# EAGLE board power_v1 (EAGLE 8.2.1)

Size 127 x 76.2 mm. Coordinates in mm from the lower left corner, seen from the top.
Outline: 0,0 127,0 127,76.2 0,76.2 0,0
Copper layers (1*16): Top 0.035mm / dielectric 1.5mm / Bottom 0.035mm
Design rules "default": minimum track width 6mil, minimum drill 0.35mm, track to track 6mil, track to pad 6mil, pad to pad 6mil, via to via 6mil, smd to smd 6mil, copper to edge 40mil, drill to drill 6mil, minimum pad ring 10mil, minimum via ring 8mil, stop-mask expansion 4mil, vias tented up to drill 0mil, thermal gap 10mil

## Footprints (pad centres in the part's own frame; a part is rotated, then mirrored left to right if it is on the bottom)
SOT457 = smd 0.5 x 0.8: P$1 -0.95,-1.15; P$2 0,-1.15; P$3 0.95,-1.15; P$4 0.95,1.15; P$5 0,1.15; P$6 -0.95,1.15
DO-219AB = smd 1.3 x 1.4: P$1 -1.45,0; P$2 1.45,0
KK254_VERT_2PIN = drill 1.2 octagon: P$1 1.27,0; P$2 -1.27,0
SOD106-R = smd 1.6 x 2.1: A 2.25,0; C -2.25,0
154-OMNI-BLOK = smd 3.81 x 4.242: P$1 -3.188,0; P$2 3.188,0
QSOP28 = smd 1.6 x 0.356: 1 -2.654,4.128; 2 -2.654,3.493; 3 -2.654,2.857; 4 -2.654,2.223; 5 -2.654,1.587; 6 -2.654,0.953; 7 -2.654,0.318; 8 -2.654,-0.318; 9 -2.654,-0.953; 10 -2.654,-1.587; 11 -2.654,-2.223; 12 -2.654,-2.857; 13 -2.654,-3.493; 14 -2.654,-4.128; 15 2.654,-4.128; 16 2.654,-3.493; 17 2.654,-2.857; 18 2.654,-2.223; 19 2.654,-1.587; 20 2.654,-0.953; 21 2.654,-0.318; 22 2.654,0.318; 23 2.654,0.953; 24 2.654,1.587; 25 2.654,2.223; 26 2.654,2.857; 27 2.654,3.493; 28 2.654,4.128
SUPERSABRE_2CIRCUIT = drill 5.25: P$1 -3.747,0; P$2 3.747,0 | hole 2.997: -8.534,-1.803; 8.534,-1.803
C0805 = smd 1.3 x 1.5: 1 -0.85,0; 2 0.85,0
E3,5-8 = drill 0.813 pad 1.6: + -1.778,0 | drill 0.813 pad 1.6 octagon: - 1.778,0
SOD123 = smd 1.4 x 1.4: A 1.9,0; C -1.9,0
MPSC-01-80 = drill 1.05 square: 1 19,0.33 | drill 1.05 octagon: 2 17,0.33; 3 15,0.33; 4 13,0.33; 5 11,0.33; 6 9,0.33; 7 7,0.33; 8 5,0.33; 9 3,0.33; 10 1,0.33; 11 -1,0.33; 12 -3,0.33; 13 -5,0.33; 14 -7,0.33; 15 -9,0.33; 16 -11,0.33; 17 -13,0.33; 18 -15,0.33; 19 -17,0.33; 20 -19,0.33; 21 19,2.33; 22 17,2.33; 23 15,2.33; 24 13,2.33; 25 11,2.33; 26 9,2.33; 27 7,2.33; 28 5,2.33; 29 3,2.33; 30 1,2.33; 31 -1,2.33; 32 -3,2.33; 33 -5,2.33; 34 -7,2.33; 35 -9,2.33; 36 -11,2.33; 37 -13,2.33; 38 -15,2.33; 39 -17,2.33; 40 -19,2.33; 41 19,4.33; 42 17,4.33; 43 15,4.33; 44 13,4.33; 45 11,4.33; 46 9,4.33; 47 7,4.33; 48 5,4.33; 49 3,4.33; 50 1,4.33; 51 -1,4.33; 52 -3,4.33; 53 -5,4.33; 54 -7,4.33; 55 -9,4.33; 56 -11,4.33; 57 -13,4.33; 58 -15,4.33; 59 -17,4.33; 60 -19,4.33; 61 19,6.33; 62 17,6.33; 63 15,6.33; 64 13,6.33; 65 11,6.33; 66 9,6.33; 67 7,6.33; 68 5,6.33; 69 3,6.33; 70 1,6.33; 71 -1,6.33; 72 -3,6.33; 73 -5,6.33; 74 -7,6.33; 75 -9,6.33; 76 -11,6.33; 77 -13,6.33; 78 -15,6.33; 79 -17,6.33; 80 -19,6.33 | drill 1.1 octagon: P1,1 22.505,0.79; P1,2 22.505,3.29; P1,3 22.505,5.87; P1,4 24.385,0.79; P1,5 24.385,3.29; P1,6 24.385,5.87; P2,1 -22.505,0.789; P2,2 -22.505,3.329; P2,3 -22.505,5.869; P2,4 -24.385,0.789; P2,5 -24.345,3.329; P2,6 -24.385,5.869 | hole 3.56: -29.085,3.916; 29.085,3.916
L6100 = drill 1 square: P$1 -3,0 | drill 1 octagon: P$2 3,0
CHIP-LED0805 = smd 1.2 x 1.2: A 0,-1.05; C 0,1.05
CHIPLED_0805 = smd 1.2 x 1.2: A 0,-1.05; C 0,1.05
0805 = smd 1.2 x 1.2: P$1 -1.05,0; P$2 1.05,0
DPAK = smd 3 x 1.6: 1 1.57,-2.3; 3 1.57,2.3 | smd 6.7 x 6.7: TAB -5.08,0
RTRIM3314J = smd 1.3 x 2: 1 -1.8,-2; 3 1.8,-2 | smd 2 x 2: 2 0,2
R0805 = smd 1.3 x 1.5: 1 -0.85,0; 2 0.85,0
R2512 = smd 1.8 x 3.2: 1 -2.8,0; 2 2.8,0
V526-0 = drill 0.813 octagon: 1 -1.27,0; 2 1.27,0
2-0.3MM-LEADS = drill 0.4: P$1 -1.27,0; P$2 1.27,0
SOT-346-3/S-MINI = smd 0.6 x 0.8: P$1 -0.95,-1; P$2 0.95,-1; P$3 0,1
TSSOP5 = smd 0.3 x 0.6: P$1 -0.65,-1.125; P$2 0,-1.125; P$3 0.65,-1.125; P$4 0.65,1.125; P$5 -0.62,1.125
SOT-223 = smd 1.5 x 2: P$1 -2.3,-3.15; P$2 0,-3.15; P$3 2.3,-3.15 | smd 3.8 x 2: P$4 0,2.54
MSOP16 = smd 0.305 x 0.889: DGATE -0.25,-2.39; ENOUT -0.75,2.39; FB -1.75,2.39; FLT -0.25,2.39; GND 0.25,2.39; HGATE 0.75,-2.39; NC -0.75,-2.39; NC1 1.25,-2.39; OUT -1.75,-2.39; OV 0.75,2.39; SENSE -1.25,-2.39; SHDN 1.75,2.39; SOURCE 0.25,-2.39; TMR -1.25,2.39; UV 1.25,2.39; VCC 1.75,-2.39
SOT23 = smd 1 x 1.4: 1 -0.95,-1.1; 2 0.95,-1.1; 3 0,1.1
SOT-23-3 = smd 1.3 x 0.6: P$1 -1.05,0.95; P$2 -1.05,-0.95; P$3 1.05,0

## Placement (x,y rotation side)
5-TVS_1  BZA408B  [SOT457]  -113.03,119.38 0 top  (outside the outline)
24V-TVS-1  VTVS  [DO-219AB]  -41.91,119.38 0 top  (outside the outline)
24V-TVS-2  VTVS  [DO-219AB]  -48.26,119.38 0 top  (outside the outline)
24V-TVS-3  VTVS  [DO-219AB]  -54.61,119.38 0 top  (outside the outline)
24V-TVS-4  VTVS  [DO-219AB]  -60.96,119.38 0 top  (outside the outline)
24V-TVS-5  VTVS  [DO-219AB]  -67.31,119.38 0 top  (outside the outline)
24V-TVS-6  VTVS  [DO-219AB]  -73.66,119.38 0 top  (outside the outline)
24V-TVS-7  VTVS  [DO-219AB]  -80.01,119.38 0 top  (outside the outline)
24V-TVS-8  VTVS  [DO-219AB]  -86.36,119.38 0 top  (outside the outline)
24V-TVS-9  VTVS  [DO-219AB]  -92.71,119.38 0 top  (outside the outline)
24V-TVS_1  VTVS  [DO-219AB]  -99.06,119.38 0 top  (outside the outline)
24V-TVS_2  VTVS  [DO-219AB]  -105.41,119.38 0 top  (outside the outline)
AUDIO  KK254_VERT_2PIN22-29-2021  [KK254_VERT_2PIN]  -109.22,36.83 0 top  (outside the outline)
AUDIO1  KK254_VERT_2PIN22-29-2021  [KK254_VERT_2PIN]  -35.56,50.8 0 top  (outside the outline)
B1-ZENER  [SOD106-R]  -33.02,123.19 0 top  (outside the outline)
B1-ZENER1  [SOD106-R]  -21.59,123.19 0 top  (outside the outline)
BATT1_FUSE  4A  [154-OMNI-BLOK]  -46.99,62.23 0 top  (outside the outline)
BATT1_IC  MAX1737  [QSOP28]  -76.2,-2.54 0 top  (outside the outline)
BATT1_IC1  MAX1737  [QSOP28]  -67.31,36.83 0 top  (outside the outline)
BATT1_IN  2_SUPERSABRE  [SUPERSABRE_2CIRCUIT]  13.97,39.37 90 top
BATT2_FUSE  4A  [154-OMNI-BLOK]  -60.96,62.23 0 top  (outside the outline)
BATT2_IN  2_SUPERSABRE  [SUPERSABRE_2CIRCUIT]  13.97,80.01 90 top
BUZZER  KK254_VERT_2PIN22-29-2021  [KK254_VERT_2PIN]  -63.5,50.8 0 top  (outside the outline)
BUZZER1  KK254_VERT_2PIN22-29-2021  [KK254_VERT_2PIN]  -91.44,50.8 0 top  (outside the outline)
C1  0.1u  [C0805]  -99.06,86.36 0 top  (outside the outline)
C2  2.2u  [C0805]  -104.14,86.36 0 top  (outside the outline)
C3  2.2u  [C0805]  -109.22,86.36 0 top  (outside the outline)
C4  1u  [C0805]  -76.2,113.03 0 top  (outside the outline)
C5  0.1u  [C0805]  -114.3,86.36 0 top  (outside the outline)
C6  1n  [C0805]  -80.01,113.03 0 top  (outside the outline)
C7  47n  [C0805]  -57.15,113.03 0 top  (outside the outline)
C8  47n  [C0805]  -62.23,113.03 0 top  (outside the outline)
C9  1n  [C0805]  -83.82,113.03 0 top  (outside the outline)
C10  1n  [C0805]  -72.39,106.68 0 top  (outside the outline)
C11  0.1  [C0805]  -77.47,106.68 0 top  (outside the outline)
C12  0.1u  [C0805]  -119.38,86.36 0 top  (outside the outline)
C13  0.1u  [C0805]  -16.51,93.98 0 top  (outside the outline)
C14  0.1u  [C0805]  -21.59,93.98 0 top  (outside the outline)
C15  0.1u  [C0805]  -26.67,93.98 0 top  (outside the outline)
C16  120u  [E3,5-8]  -93.98,60.96 0 top  (outside the outline)
C17  47n  [C0805]  -82.55,106.68 0 top  (outside the outline)
C18  22u  [C0805]  -87.63,106.68 0 top  (outside the outline)
C20  0.1  [C0805]  -92.71,106.68 0 top  (outside the outline)
C25  0.1  [C0805]  -97.79,106.68 0 top  (outside the outline)
C26  0.1  [C0805]  -102.87,106.68 0 top  (outside the outline)
C60  1u  [C0805]  -107.95,106.68 0 top  (outside the outline)
C61  10u  [C0805]  -113.03,106.68 0 top  (outside the outline)
C62  10u  [C0805]  -118.11,106.68 0 top  (outside the outline)
C63  0.1u  [C0805]  -31.75,93.98 0 top  (outside the outline)
C64  47n  [C0805]  -16.51,113.03 0 top  (outside the outline)
C65  22u  [C0805]  -21.59,113.03 0 top  (outside the outline)
C66  2.2u  [C0805]  -36.83,93.98 0 top  (outside the outline)
C67  2.2u  [C0805]  -41.91,93.98 0 top  (outside the outline)
C69  1u  [C0805]  -26.67,113.03 0 top  (outside the outline)
C70  0.1u  [C0805]  -46.99,93.98 0 top  (outside the outline)
C71  1n  [C0805]  -31.75,113.03 0 top  (outside the outline)
C72  47n  [C0805]  -36.83,113.03 0 top  (outside the outline)
C73  47n  [C0805]  -41.91,113.03 0 top  (outside the outline)
C74  1n  [C0805]  -46.99,113.03 0 top  (outside the outline)
C75  1n  [C0805]  -52.07,113.03 0 top  (outside the outline)
C78  0.1u  [C0805]  -52.07,93.98 0 top  (outside the outline)
C79  0.1u  [C0805]  -57.15,93.98 0 top  (outside the outline)
C82  0.1u  [C0805]  -62.23,93.98 0 top  (outside the outline)
C83  0.1u  [C0805]  -67.31,93.98 0 top  (outside the outline)
C84  120u  [E3,5-8]  -105.41,60.96 0 top  (outside the outline)
CHARGING-SWITCH  KK254_VERT_2PIN22-29-2021  [KK254_VERT_2PIN]  -35.56,62.23 0 top  (outside the outline)
D1  [SOD123]  -39.37,123.19 0 top  (outside the outline)
D2  [SOD123]  -45.72,123.19 0 top  (outside the outline)
JP1  [MPSC-01-80]  90.17,5.08 0 top
L1  10uH  [L6100]  -33.02,36.83 0 top  (outside the outline)
L2  10uH  [L6100]  -44.45,36.83 0 top  (outside the outline)
LED1  FASTCHG  [CHIP-LED0805]  -77.47,58.42 0 top  (outside the outline)
LED2  FULLCHG  [CHIP-LED0805]  -16.51,69.85 0 top  (outside the outline)
LED3  FAULT  [CHIP-LED0805]  -40.64,78.74 0 top  (outside the outline)
LED4  Batt Connect.  [CHIP-LED0805]  -53.34,33.02 0 top  (outside the outline)
LED5  FASTCHG  [CHIP-LED0805]  -83.82,58.42 0 top  (outside the outline)
LED6  FULLCHG  [CHIP-LED0805]  -22.86,69.85 0 top  (outside the outline)
LED7  Shore Power  [CHIP-LED0805]  -74.93,33.02 0 top  (outside the outline)
LED8  CHARGING  [CHIP-LED0805]  -71.12,58.42 0 top  (outside the outline)
LED9  FAULT  [CHIP-LED0805]  -46.99,78.74 0 top  (outside the outline)
LED10  Red  [CHIPLED_0805]  -109.22,78.74 0 top  (outside the outline)
LED11  Red  [CHIPLED_0805]  -115.57,78.74 0 top  (outside the outline)
LED12  [CHIPLED_0805]  -120.65,78.74 0 top  (outside the outline)
LED13  [CHIPLED_0805]  -13.97,86.36 0 top  (outside the outline)
LED14  Blue  [0805]  -60.96,124.46 0 top  (outside the outline)
LED15  Blue  [0805]  -64.77,124.46 0 top  (outside the outline)
LED16  Green  [0805]  -68.58,124.46 0 top  (outside the outline)
LED17  Green  [0805]  -72.39,124.46 0 top  (outside the outline)
LED18  Batt Connect.  [CHIP-LED0805]  -59.69,33.02 0 top  (outside the outline)
LED19  ORING  [CHIP-LED0805]  -34.29,78.74 0 top  (outside the outline)
NMOS1  STD95N2LH5  [DPAK]  -82.55,24.13 0 top  (outside the outline)
NMOS2  STD95N2LH5  [DPAK]  -96.52,24.13 0 top  (outside the outline)
NMOS5  STD95N2LH5  [DPAK]  -110.49,24.13 0 top  (outside the outline)
NMOS6  STD95N2LH5  [DPAK]  -17.78,38.1 0 top  (outside the outline)
POT  10k  [RTRIM3314J]  -17.78,80.01 0 top  (outside the outline)
POT1  10k  [RTRIM3314J]  -26.67,80.01 0 top  (outside the outline)
R1  2-3k  [R0805]  -72.39,93.98 0 top  (outside the outline)
R2  ~50k  [R0805]  -36.83,86.36 0 top  (outside the outline)
R3  ~50k  [R0805]  -43.18,86.36 0 top  (outside the outline)
R4  2-3k  [R0805]  -77.47,93.98 0 top  (outside the outline)
R5  10k  [R0805]  -72.39,113.03 0 top  (outside the outline)
R6  330  [R0805]  -67.31,113.03 0 top  (outside the outline)
R7  100m  [R2512]  -67.31,72.39 0 top  (outside the outline)
R8  100m  [R2512]  -76.2,72.39 0 top  (outside the outline)
R9  1.2k  [R0805]  -82.55,93.98 0 top  (outside the outline)
R10  50k  [R0805]  -46.99,100.33 0 top  (outside the outline)
R11  1.2k  [R0805]  -87.63,93.98 0 top  (outside the outline)
R12  50k  [R0805]  -52.07,100.33 0 top  (outside the outline)
R13  510  [R0805]  -57.15,100.33 0 top  (outside the outline)
R14  50k  [R0805]  -62.23,100.33 0 top  (outside the outline)
R15  1.2k  [R0805]  -92.71,93.98 0 top  (outside the outline)
R16  50k  [R0805]  -67.31,100.33 0 top  (outside the outline)
R17  1.2k  [R0805]  -97.79,93.98 0 top  (outside the outline)
R18  50k  [R0805]  -72.39,100.33 0 top  (outside the outline)
R19  680  [R0805]  -77.47,100.33 0 top  (outside the outline)
R20  50k  [R0805]  -82.55,100.33 0 top  (outside the outline)
R21  510  [R0805]  -87.63,100.33 0 top  (outside the outline)
R22  680  [R0805]  -92.71,100.33 0 top  (outside the outline)
R23  510  [R0805]  -97.79,100.33 0 top  (outside the outline)
R24  6.8k  [R0805]  -102.87,93.98 0 top  (outside the outline)
R27  12k  [R0805]  -102.87,100.33 0 top  (outside the outline)
R28  1.5k  [R0805]  -107.95,93.98 0 top  (outside the outline)
R29  100m  [R2512]  -85.09,72.39 0 top  (outside the outline)
R30  ~50k  [R0805]  -49.53,86.36 0 top  (outside the outline)
R31  ~50k  [R0805]  -55.88,86.36 0 top  (outside the outline)
R32  10k  [R0805]  -107.95,100.33 0 top  (outside the outline)
R33  330  [R0805]  -113.03,100.33 0 top  (outside the outline)
R34  100m  [R2512]  -93.98,72.39 0 top  (outside the outline)
R35  51k  [R0805]  -118.11,100.33 0 top  (outside the outline)
R36  5m  [R0805]  -16.51,106.68 0 top  (outside the outline)
R37  10\  [R0805]  -21.59,106.68 0 top  (outside the outline)
R38  200k  [R0805]  -87.63,86.36 0 top  (outside the outline)
R39  8.2k  [R0805]  -113.03,93.98 0 top  (outside the outline)
R40  5.1k  [R0805]  -118.11,93.98 0 top  (outside the outline)
R41  20.8k  [R0805]  -30.48,86.36 0 top  (outside the outline)
R42  51k  [R0805]  -26.67,106.68 0 top  (outside the outline)
R43  5m  [R0805]  -31.75,106.68 0 top  (outside the outline)
R44  10\  [R0805]  -36.83,106.68 0 top  (outside the outline)
R45  200k  [R0805]  -93.98,86.36 0 top  (outside the outline)
R46  8.2k  [R0805]  -16.51,100.33 0 top  (outside the outline)
R47  5.1k  [R0805]  -21.59,100.33 0 top  (outside the outline)
R50  20k+  [R0805]  -62.23,86.36 0 top  (outside the outline)
R51  430  [R0805]  -41.91,106.68 0 top  (outside the outline)
R52  330  [R0805]  -46.99,106.68 0 top  (outside the outline)
R53  20k+  [R0805]  -68.58,86.36 0 top  (outside the outline)
R54  430  [R0805]  -52.07,106.68 0 top  (outside the outline)
R55  330  [R0805]  -57.15,106.68 0 top  (outside the outline)
R56  1.2k  [R0805]  -26.67,100.33 0 top  (outside the outline)
R57  20k+  [R0805]  -74.93,86.36 0 top  (outside the outline)
R58  1.2k  [R0805]  -31.75,100.33 0 top  (outside the outline)
R59  20k+  [R0805]  -81.28,86.36 0 top  (outside the outline)
R60  330  [R0805]  -62.23,106.68 0 top  (outside the outline)
R61  330  [R0805]  -67.31,106.68 0 top  (outside the outline)
R62  1.5k  [R0805]  -36.83,100.33 0 top  (outside the outline)
R63  1.5k  [R0805]  -41.91,100.33 0 top  (outside the outline)
SHORE_IN  2_SUPERSABRE  [SUPERSABRE_2CIRCUIT]  113.03,90.17 0 top  (outside the outline)
TEST-PTS  0  [V526-0]  -114.3,71.12 0 top  (outside the outline)
TEST-PTS1  0  [V526-0]  -105.41,71.12 0 top  (outside the outline)
THERM1  NTCLE201E3  [2-0.3MM-LEADS]  -29.21,119.38 0 top  (outside the outline)
THERM2  NTCLE201E3  [2-0.3MM-LEADS]  -35.56,119.38 0 top  (outside the outline)
U1  SSM3J353F  [SOT-346-3/S-MINI]  -97.79,113.03 0 top  (outside the outline)
U2  SSM3J353F  [SOT-346-3/S-MINI]  -104.14,113.03 0 top  (outside the outline)
U3  SSM3J353F  [SOT-346-3/S-MINI]  -110.49,113.03 0 top  (outside the outline)
U4  74LVC1G14  [TSSOP5]  -52.07,124.46 0 top  (outside the outline)
U7  SSM3J353F  [SOT-346-3/S-MINI]  -116.84,113.03 0 top  (outside the outline)
U8  SSM3J353F  [SOT-346-3/S-MINI]  -15.24,119.38 0 top  (outside the outline)
U9  SSM3J353F  [SOT-346-3/S-MINI]  -21.59,119.38 0 top  (outside the outline)
U56  74LVC1G14  [TSSOP5]  -57.15,124.46 0 top  (outside the outline)
U57  NCP1117  [SOT-223]  -113.03,60.96 0 top  (outside the outline)
U$1  LTC4364MSOP  [MSOP16]  -19.05,86.36 0 top  (outside the outline)
U$2  STD95N2LH5  [DPAK]  -60.96,80.01 0 top  (outside the outline)
U$3  STD95N2LH5  [DPAK]  -74.93,80.01 0 top  (outside the outline)
U$7  SSM3J353F  [SOT-346-3/S-MINI]  -76.2,123.19 0 top  (outside the outline)
U$8  SSM3J353F  [SOT-346-3/S-MINI]  -80.01,123.19 0 top  (outside the outline)
U$9  BSS138CT-NDSOT23  [SOT23]  -41.91,72.39 0 top  (outside the outline)
U$10  BSS138CT-NDSOT23  [SOT23]  -59.69,72.39 0 top  (outside the outline)
U$11  TL431DBZ  [SOT-23-3]  -88.9,113.03 0 top  (outside the outline)
U$12  TL431DBZ  [SOT-23-3]  -93.98,113.03 0 top  (outside the outline)
U$27  LTC4364MSOP  [MSOP16]  -24.13,86.36 0 top  (outside the outline)
U$28  STD95N2LH5  [DPAK]  -88.9,80.01 0 top  (outside the outline)
U$32  STD95N2LH5  [DPAK]  -102.87,80.01 0 top  (outside the outline)

## Library data of the parts
5-TVS_1 = diodes
24V-TVS-1-24V-TVS-9 24V-TVS_1 24V-TVS_2 B1-ZENER B1-ZENER1 D1 D2 = diode
AUDIO AUDIO1 BATT1_IN BATT2_IN BUZZER BUZZER1 CHARGING-SWITCH SHORE_IN = molex
BATT1_FUSE BATT2_FUSE = littelfuse
BATT1_IC BATT1_IC1 = maxim
C1-C18 C20 C25 C26 C60-C67 C69-C75 C78 C79 C82-C84 L1 L2 POT POT1 R1-R24 R27-R47 R50-R63 TEST-PTS TEST-PTS1 = resistor
JP1 = samtec
LED1-LED19 = led
NMOS1 NMOS2 NMOS5 NMOS6 U1-U3 U7-U9 U$2 U$3 U$7 U$8 U$28 U$32 = transistors
THERM1 THERM2 = vishay
U4 U56 = NXP
U57 = ONSemi
U$1 U$27 = linear
U$9 U$10 = transistor-fet
U$11 U$12 = texas

## Nets
+5V: C11.1 C20.1 C62.1 R24.2 U4.P$5 U56.P$5 U57.P$2 U57.P$4
BATT1_P: 24V-TVS_2.P$2 BATT1_FUSE.P$1 BATT1_IN.P$1
BATT2_P: 24V-TVS-3.P$2 BATT2_FUSE.P$1 BATT2_IN.P$1
BATT_1: BATT1_FUSE.P$2 BATT1_IC.7 C83.1 C84.+ R29.1 R34.1
BATT_2: BATT1_IC1.7 BATT2_FUSE.P$2 C15.1 C16.+ R7.1 R8.1
CCI_1: BATT1_IC.11 C72.1
CCI_2: BATT1_IC1.11 C7.1
CCS_1: BATT1_IC.10 C73.1
CCS_2: BATT1_IC1.10 C8.1
CCV_1: BATT1_IC.9 C71.1 R32.2
CCV_2: BATT1_IC1.9 C6.1 R5.2
CHARGE1_!FASTCHG!: BATT1_IC.16 R10.1 U7.P$1
CHARGE1_!FAULT!: BATT1_IC.15 R14.1 U9.P$1
CHARGE1_!FULLCHG!: BATT1_IC.17 R12.1 U8.P$1
CHARGE2_!FASTCHG!: BATT1_IC1.16 R16.1 U1.P$1
CHARGE2_!FAULT!: BATT1_IC1.15 R20.1 U3.P$1
CHARGE2_!FULLCHG!: BATT1_IC1.17 R18.1 U2.P$1
CHARGE-SWT: 5-TVS_1.P$1 CHARGING-SWITCH.P$1 R23.1 R24.1
CHARGE_!SHDN!: BATT1_IC1.18 BATT1_IC.18 R33.2 U4.P$2 U56.P$4
DCIN_1: B1-ZENER.C BATT1_IC.26 BATT1_IC.27 BATT1_IC.28 C63.1 NMOS1.TAB
DCIN_2: B1-ZENER1.C BATT1_IC1.26 BATT1_IC1.27 BATT1_IC1.28 C1.1 NMOS5.TAB
DHI1: BATT1_IC.25 NMOS1.1
DHI2: BATT1_IC1.25 NMOS5.1
DLO1: BATT1_IC.21 NMOS2.1
DLO2: BATT1_IC1.21 NMOS6.1
GND: 5-TVS_1.P$2 24V-TVS-1.P$1 24V-TVS-2.P$1 24V-TVS-3.P$1 24V-TVS-4.P$1 24V-TVS-5.P$1 24V-TVS-6.P$1 24V-TVS-7.P$1 24V-TVS-8.P$1 24V-TVS-9.P$1 24V-TVS_1.P$1 24V-TVS_2.P$1 AUDIO1.P$2 AUDIO.P$2 BATT1_IC1.6 BATT1_IC.6 BATT1_IN.P$2 BATT2_IN.P$2 BUZZER1.P$2 BUZZER.P$2 C1.2 C2.2 C3.2 C4.2 C5.2 C6.2 C7.2 C8.2 C9.2 C10.2 C11.2 C13.2 C14.2 C15.2 C16.- C17.2 C18.2 C20.2 C25.2 C26.2 C60.2 C61.2 C62.2 C63.2 C64.2 C65.2 C66.2 C67.2 C69.2 C70.2 C71.2 C72.2 C73.2 C74.2 C75.2 C79.2 C82.2 C83.2 C84.- CHARGING-SWITCH.P$2 JP1.P1,1 JP1.P1,2 JP1.P1,3 JP1.P1,4 JP1.P1,5 JP1.P1,6 JP1.P2,1 JP1.P2,2 JP1.P2,3 JP1.P2,4 JP1.P2,5 JP1.P2,6 LED1.C LED2.C LED3.C LED4.C LED5.C LED6.C LED7.C LED8.C LED9.C LED10.C LED11.C LED14.P$2 LED15.P$2 LED16.P$2 LED17.P$2 LED18.C LED19.C POT1.1 POT.1 R3.1 R27.1 R31.1 R40.1 R41.1 R47.1 SHORE_IN.P$2 TEST-PTS1.1 TEST-PTS.1 THERM1.P$2 THERM2.P$2 U4.P$3 U56.P$3 U57.P$1 U$1.GND U$1.OV U$9.2 U$10.2 U$11.P$3 U$12.P$3 U$27.GND U$27.OV
LIN_1: L1.P$1 NMOS1.3 NMOS2.TAB
LIN_2: L2.P$1 NMOS5.3 NMOS6.TAB
LOUT_1: BATT1_IC.19 C82.1 L1.P$2 R29.2 R34.2
LOUT_2: BATT1_IC1.19 C14.1 L2.P$2 R7.2 R8.2
N$1: LED4.A R1.1
N$2: LED1.A R9.1
N$3: BATT1_IC.20 NMOS2.3
N$4: C5.1 R5.1
N$5: BATT1_IC1.24 C12.1
N$6: BATT1_IC1.23 C12.2 D2.C
N$7: BATT1_IC1.22 C13.1 D2.A
N$8: LED5.A R15.1
N$9: R15.2 U1.P$2
N$10: LED6.A R17.1
N$11: R17.2 U2.P$2
N$12: LED3.A R13.1
N$13: LED9.A R21.1
N$14: BUZZER1.P$1 R21.2 R22.1
N$15: R22.2 U3.P$2
N$16: BATT1_IC1.20 NMOS6.3
N$17: R35.2 R39.1
N$18: U$27.SOURCE U$28.3 U$32.3
N$19: R41.2 R45.1 U$1.UV
N$20: R42.1 R47.2 U$1.FB
N$21: R44.1 U$1.HGATE
N$22: LED2.A R11.1
N$23: R9.2 U7.P$2
N$24: C17.1 U$1.TMR
N$25: R42.2 R46.1
N$26: R11.2 U8.P$2
N$27: R44.2 U$2.1
N$28: U$1.SOURCE U$2.3 U$3.3
N$29: BUZZER.P$1 R13.2 R19.1
N$30: R19.2 U9.P$2
N$31: R43.1 U$1.SENSE U$3.TAB
N$32: U$1.DGATE U$3.1
N$35: LED7.A R28.1
N$37: R37.1 U$27.HGATE
N$38: LED18.A R4.1
N$39: R27.2 R38.1 U$27.UV
N$40: LED10.A R51.1
N$41: LED19.A R6.1
N$42: R52.2 U$7.P$3
N$43: AUDIO.P$1 R51.2 R52.1
N$44: LED11.A R54.1
N$46: R55.2 U$8.P$3
N$49: C60.1 R23.2 U56.P$2
N$50: R35.1 R40.2 U$27.FB
N$53: C64.1 U$27.TMR
N$55: AUDIO1.P$1 R54.2 R55.1
N$56: R56.1 U$9.3
N$57: LED8.A R33.1
N$58: LED12.C R56.2
N$59: R37.2 U$28.1
N$60: R36.1 U$27.SENSE U$32.TAB
N$61: U$27.DGATE U$32.1
N$62: R58.1 U$10.3
N$63: LED13.C R58.2
N$64: C70.1 R32.1
N$65: POT.2 TEST-PTS.2 U$11.P$2
N$66: LED14.P$1 R60.1 U$11.P$1
N$67: POT1.2 TEST-PTS1.2 U$12.P$2
N$68: LED15.P$1 R61.1 U$12.P$1
N$71: LED16.P$1 R62.1
N$72: LED17.P$1 R63.1
N$75: BATT1_IC.24 C78.1
N$76: BATT1_IC.23 C78.2 D1.C
N$83: BATT1_IC.22 C79.1 D1.A
ORING1_!FAULT!: R50.1 U$1.FLT U$7.P$1
ORING1_ENOUT: U$1.ENOUT
ORING2_!FAULT!: R53.1 U$8.P$1 U$27.FLT
ORING2_ENOUT: R57.1 U$9.1 U$27.ENOUT
ORING_!SHDN!: R6.2 U4.P$4 U$1.SHDN U$27.SHDN
ORING_ENOUT: R59.1 U$10.1
REF_1: BATT1_IC.2 BATT1_IC.3 BATT1_IC.5 C69.1 R30.1
REF_2: BATT1_IC1.2 BATT1_IC1.3 BATT1_IC1.5 C4.1 R2.1
THM1: BATT1_IC.4 THERM1.P$1
THM2: BATT1_IC1.4 THERM2.P$1
TIMER1_1: BATT1_IC.13 C74.1
TIMER1_2: BATT1_IC1.13 C9.1
TIMER2_1: BATT1_IC.14 C75.1
TIMER2_2: BATT1_IC1.14 C10.1
V_BATT: 24V-TVS-6.P$2 24V-TVS-7.P$2 24V-TVS-8.P$2 24V-TVS-9.P$2 C18.1 C65.1 JP1.1 JP1.2 JP1.3 JP1.4 JP1.5 JP1.6 JP1.7 JP1.8 JP1.9 JP1.10 JP1.21 JP1.22 JP1.23 JP1.24 JP1.25 JP1.26 JP1.27 JP1.28 JP1.29 JP1.30 JP1.41 JP1.42 JP1.43 JP1.44 JP1.45 JP1.46 JP1.47 JP1.48 JP1.49 JP1.50 JP1.61 JP1.62 JP1.63 JP1.64 JP1.65 JP1.66 JP1.67 JP1.68 JP1.69 JP1.70 R36.2 R39.2 R43.2 R46.2 U$1.OUT U$27.OUT
V_BATT1: C25.1 C61.1 LED12.A POT1.3 R1.2 R45.2 R53.2 R57.2 R61.2 R63.2 U57.P$3 U$1.VCC U$2.TAB U$8.P$2
V_BATT2: C26.1 LED13.A POT.3 R4.2 R38.2 R50.2 R59.2 R60.2 R62.2 U$7.P$2 U$27.VCC U$28.TAB
V_SHORE: 24V-TVS-1.P$2 24V-TVS-2.P$2 24V-TVS-4.P$2 24V-TVS-5.P$2 24V-TVS_1.P$2 B1-ZENER1.A B1-ZENER.A JP1.11 JP1.12 JP1.13 JP1.14 JP1.15 JP1.16 JP1.17 JP1.18 JP1.19 JP1.20 JP1.31 JP1.32 JP1.33 JP1.34 JP1.35 JP1.36 JP1.37 JP1.38 JP1.39 JP1.40 JP1.51 JP1.52 JP1.53 JP1.54 JP1.55 JP1.56 JP1.57 JP1.58 JP1.59 JP1.60 JP1.71 JP1.72 JP1.73 JP1.74 JP1.75 JP1.76 JP1.77 JP1.78 JP1.79 JP1.80 R10.2 R12.2 R14.2 R16.2 R18.2 R20.2 R28.2 SHORE_IN.P$1 U1.P$3 U2.P$3 U3.P$3 U7.P$3 U8.P$3 U9.P$3
VADJ_1: BATT1_IC.8 R30.2 R31.2
VADJ_2: BATT1_IC1.8 R2.2 R3.2
VL_1: BATT1_IC.1 BATT1_IC.12 C66.1 C67.1
VL_2: BATT1_IC1.1 BATT1_IC1.12 C2.1 C3.1

## Tracks (layer width: path | path; a pad name or v marks a point on that pad's centre or on a via)
+5V  (7 unrouted)
BATT1_P  (2 unrouted)
BATT2_P  (2 unrouted)
BATT_1  (5 unrouted)
BATT_2  (5 unrouted)
CCI_1  (1 unrouted)
CCI_2  (1 unrouted)
CCS_1  (1 unrouted)
CCS_2  (1 unrouted)
CCV_1  (2 unrouted)
CCV_2  (2 unrouted)
CHARGE1_!FASTCHG!  (2 unrouted)
CHARGE1_!FAULT!  (2 unrouted)
CHARGE1_!FULLCHG!  (2 unrouted)
CHARGE2_!FASTCHG!  (2 unrouted)
CHARGE2_!FAULT!  (2 unrouted)
CHARGE2_!FULLCHG!  (2 unrouted)
CHARGE-SWT  (3 unrouted)
CHARGE_!SHDN!  (4 unrouted)
DCIN_1  (5 unrouted)
DCIN_2  (5 unrouted)
DHI1  (1 unrouted)
DHI2  (1 unrouted)
DLO1  (1 unrouted)
DLO2  (1 unrouted)
GND  (112 unrouted)
LIN_1  (2 unrouted)
LIN_2  (2 unrouted)
LOUT_1  (4 unrouted)
LOUT_2  (4 unrouted)
N$1  (1 unrouted)
N$2  (1 unrouted)
N$3  (1 unrouted)
N$4  (1 unrouted)
N$5  (1 unrouted)
N$6  (2 unrouted)
N$7  (2 unrouted)
N$8  (1 unrouted)
N$9  (1 unrouted)
N$10  (1 unrouted)
N$11  (1 unrouted)
N$12  (1 unrouted)
N$13  (1 unrouted)
N$14  (2 unrouted)
N$15  (1 unrouted)
N$16  (1 unrouted)
N$17  (1 unrouted)
N$18  (6 unrouted)
N$19  (2 unrouted)
N$20  (2 unrouted)
N$21  (1 unrouted)
N$22  (1 unrouted)
N$23  (1 unrouted)
N$24  (1 unrouted)
N$25  (1 unrouted)
N$26  (1 unrouted)
N$27  (1 unrouted)
N$28  (6 unrouted)
N$29  (2 unrouted)
N$30  (1 unrouted)
N$31  (2 unrouted)
N$32  (1 unrouted)
N$35  (1 unrouted)
N$37  (1 unrouted)
N$38  (1 unrouted)
N$39  (2 unrouted)
N$40  (1 unrouted)
N$41  (1 unrouted)
N$42  (1 unrouted)
N$43  (2 unrouted)
N$44  (1 unrouted)
N$46  (1 unrouted)
N$49  (2 unrouted)
N$50  (2 unrouted)
N$53  (1 unrouted)
N$55  (2 unrouted)
N$56  (1 unrouted)
N$57  (1 unrouted)
N$58  (1 unrouted)
N$59  (1 unrouted)
N$60  (2 unrouted)
N$61  (1 unrouted)
N$62  (1 unrouted)
N$63  (1 unrouted)
N$64  (1 unrouted)
N$65  (2 unrouted)
N$66  (2 unrouted)
N$67  (2 unrouted)
N$68  (2 unrouted)
N$71  (1 unrouted)
N$72  (1 unrouted)
N$75  (1 unrouted)
N$76  (2 unrouted)
N$83  (2 unrouted)
ORING1_!FAULT!  (2 unrouted)
ORING2_!FAULT!  (2 unrouted)
ORING2_ENOUT  (2 unrouted)
ORING_!SHDN!  (3 unrouted)
ORING_ENOUT  (1 unrouted)
REF_1  (4 unrouted)
REF_2  (4 unrouted)
THM1  (1 unrouted)
THM2  (1 unrouted)
TIMER1_1  (1 unrouted)
TIMER1_2  (1 unrouted)
TIMER2_1  (1 unrouted)
TIMER2_2  (1 unrouted)
V_BATT  (51 unrouted)
V_BATT1  (13 unrouted)
V_BATT2  (11 unrouted)
V_SHORE  (60 unrouted)
VADJ_1  (2 unrouted)
VADJ_2  (2 unrouted)
VL_1  (3 unrouted)
VL_2  (3 unrouted)

## Text on the board
tDocu: DO NOT FORGET MOUTING HOLES!!!!